# EAGLE board microSD-adapter (EAGLE 7.5.0)
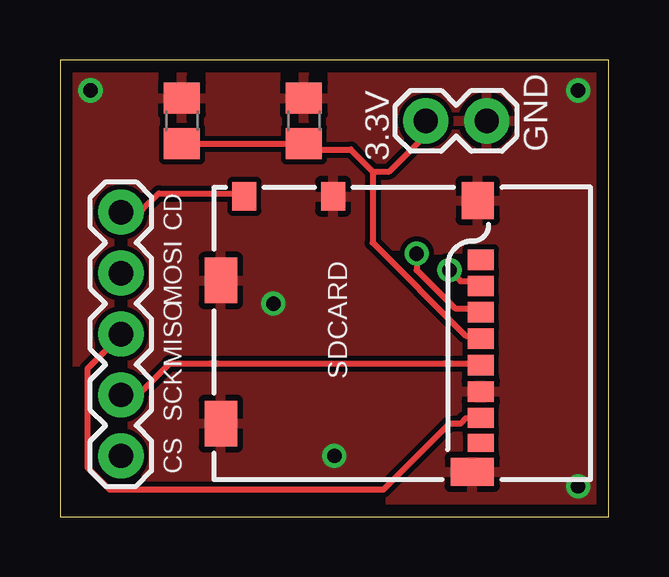
[diagram p0: board, top side]
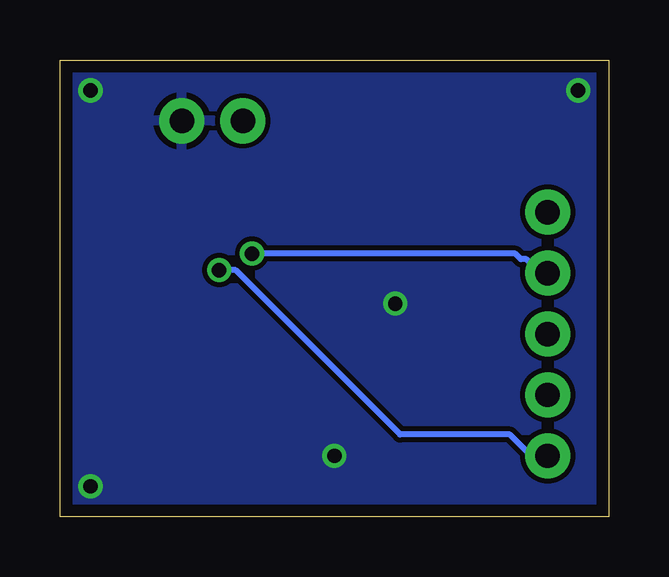
[diagram p1: board, bottom side, seen from below]

Size 22.86 x 19.05 mm. Coordinates in mm from the lower left corner, seen from the top.
Outline: 0,0 22.86,0 22.86,19.05 0,19.04 0,0
Copper layers (1*16): Top 0.035mm / dielectric 1.5mm / Bottom 0.035mm
Design rules "default *": minimum track width 10mil, minimum drill 0.6mm, track to track 8mil, track to pad 8mil, pad to pad 8mil, via to via 8mil, smd to smd 8mil, copper to edge 20mil, drill to drill 8mil, minimum pad ring 10mil, minimum via ring 8mil, stop-mask expansion 4mil, vias tented up to drill 0mil, thermal gap 10mil
Net classes: 0 default: width 0.254 mm

## Footprints (pad centres in the part's own frame; a part is rotated, then mirrored left to right if it is on the bottom)
C0805 = smd 1.3 x 1.5: 1 -0.95,0; 2 0.95,0
1X05 = drill 1.016 pad 1.88: 1 0,0; 2 2.54,0; 3 5.08,0; 4 7.62,0; 5 10.16,0
1X02 = drill 1.016 pad 1.88: 1 0,0; 2 2.54,0
MICRO-SD-MOLEX-CORRECT = smd 0.85 x 1.1: 1 3.105,0.25; 2 2.005,0.25; 3 0.905,0.25; 4 -0.195,0.25; 5 -1.295,0.25; 6 -2.395,0.25; 7 -3.495,0.25 | smd 0.75 x 1.1: 8 -4.545,0.25 | smd 1.2 x 1: CD1 5.74,6.4; CD2 5.74,10.1 | smd 1.55 x 1.35: G1 5.565,0.375 | smd 1.17 x 1.8: G2 -5.755,0.6 | smd 1.9 x 1.35: G3 -3.735,11.075; G4 2.235,11.075

## Placement (x,y rotation side)
C6  0.1u  [C0805]  10.16,16.51 90 top
C7  1u  [C0805]  5.08,16.51 90 top
JP1  [1X05]  2.54,2.54 90 top
JP2  [1X02]  17.78,16.51 180 top
SDCARD  USD-SOCKETMOLEX-CORRECT  [MICRO-SD-MOLEX-CORRECT]  17.78,7.62 90 top

## Library data of the parts
C6 = rcl; PARTNO: 08055C104KAT2A
C7 = rcl; PARTNO: CC0805KKX7R7BB105
JP1 JP2 = SparkFun-Connectors
SDCARD = MuniRent; PARTNO: 1040310811

## Nets
3.3V: C6.1 C7.1 JP2.2 SDCARD.4
GND: C6.2 C7.2 JP2.1 SDCARD.6 SDCARD.CD1 SDCARD.G1 SDCARD.G2 SDCARD.G3 SDCARD.G4
SD_CS: JP1.1 SDCARD.2
SD_DETECT: JP1.5 SDCARD.CD2
SPI_MISO: JP1.3 SDCARD.7
SPI_MOSI: JP1.4 SDCARD.3
SPI_SCK: JP1.2 SDCARD.5

## Tracks (layer width: path | path; a pad name or v marks a point on that pad's centre or on a via)
3.3V
  Top 0.254: 13.03,14.4 13.03,11.43 16.92,7.54 17.37,7.54 SDCARD.4 | 13.03,14.4 12.12,15.32 10.52,15.32 10.29,15.54 C6.1 10.06,15.54 5.26,15.54 C7.1 | 13.03,14.4 13.72,14.4 15.09,15.77 15.09,16.46 JP2.2
GND  (via drill 0.6)
  other vias: 8.89,8.89 1.27,17.78 21.59,17.78 21.59,1.27 11.43,2.54
  pour Top: 0,19.05 22.86,19.05 22.86,0 0,0
  pour Bottom: 0,19.05 22.86,19.05 22.86,0 0,0
SD_CS  (via drill 0.6)
  Top 0.254: v16.23,10.29 16.69,9.83 17.37,9.83 SDCARD.2
  Bottom 0.254: v16.23,10.29 15.54,10.29 8.69,3.43 4.12,3.43 3.43,2.74 2.74,2.74 JP1.1
SD_DETECT
  Top 0.254: SDCARD.CD2 7.54,13.49 4.12,13.49 3.43,12.8 2.74,12.8 JP1.5
SPI_MISO
  Top 0.254: SDCARD.7 17.37,4.12 16.92,4.12 16.69,3.89 16.23,3.89 13.49,1.14 2.06,1.14 1.14,2.06 1.14,6.17 2.52,7.54 JP1.3
SPI_MOSI  (via drill 0.6)
  Top 0.254: v14.86,10.97 14.86,10.29 16.46,8.69 17.37,8.69 SDCARD.3
  Bottom 0.254: v14.86,10.97 3.89,10.97 3.66,10.74 3.43,10.74 2.74,10.06 JP1.4
SPI_SCK
  Top 0.254: SDCARD.5 17.37,6.4 4.57,6.4 3.43,5.26 2.74,5.26 JP1.2

## Text on the board
tPlace: 3.3V | GND | CD | MOSI | MISO | SCK | CS